# Altium PCB Ej4Electro3.PcbDoc
Units mm, origin at the board's own origin, x right, y up, seen from the top; angles counter-clockwise.
Board outline 100 x 50 mm, 2 copper layers (Top Layer, Bottom Layer); 23 components, 20 nets, 70 pads, 0 vias.
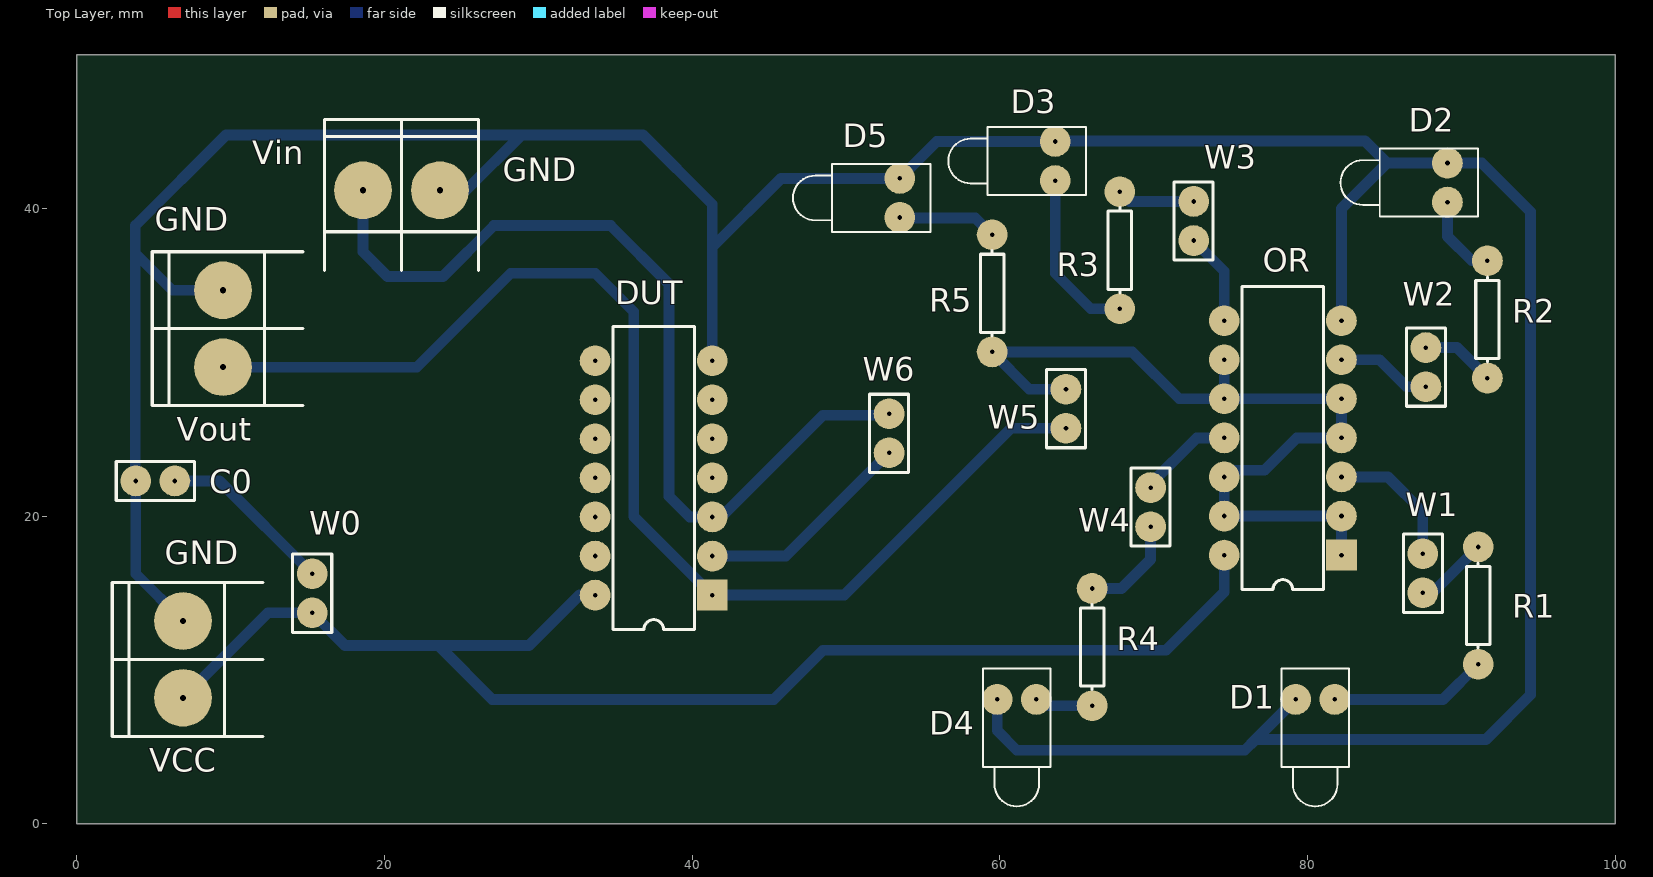
[diagram p0: Top Layer view]
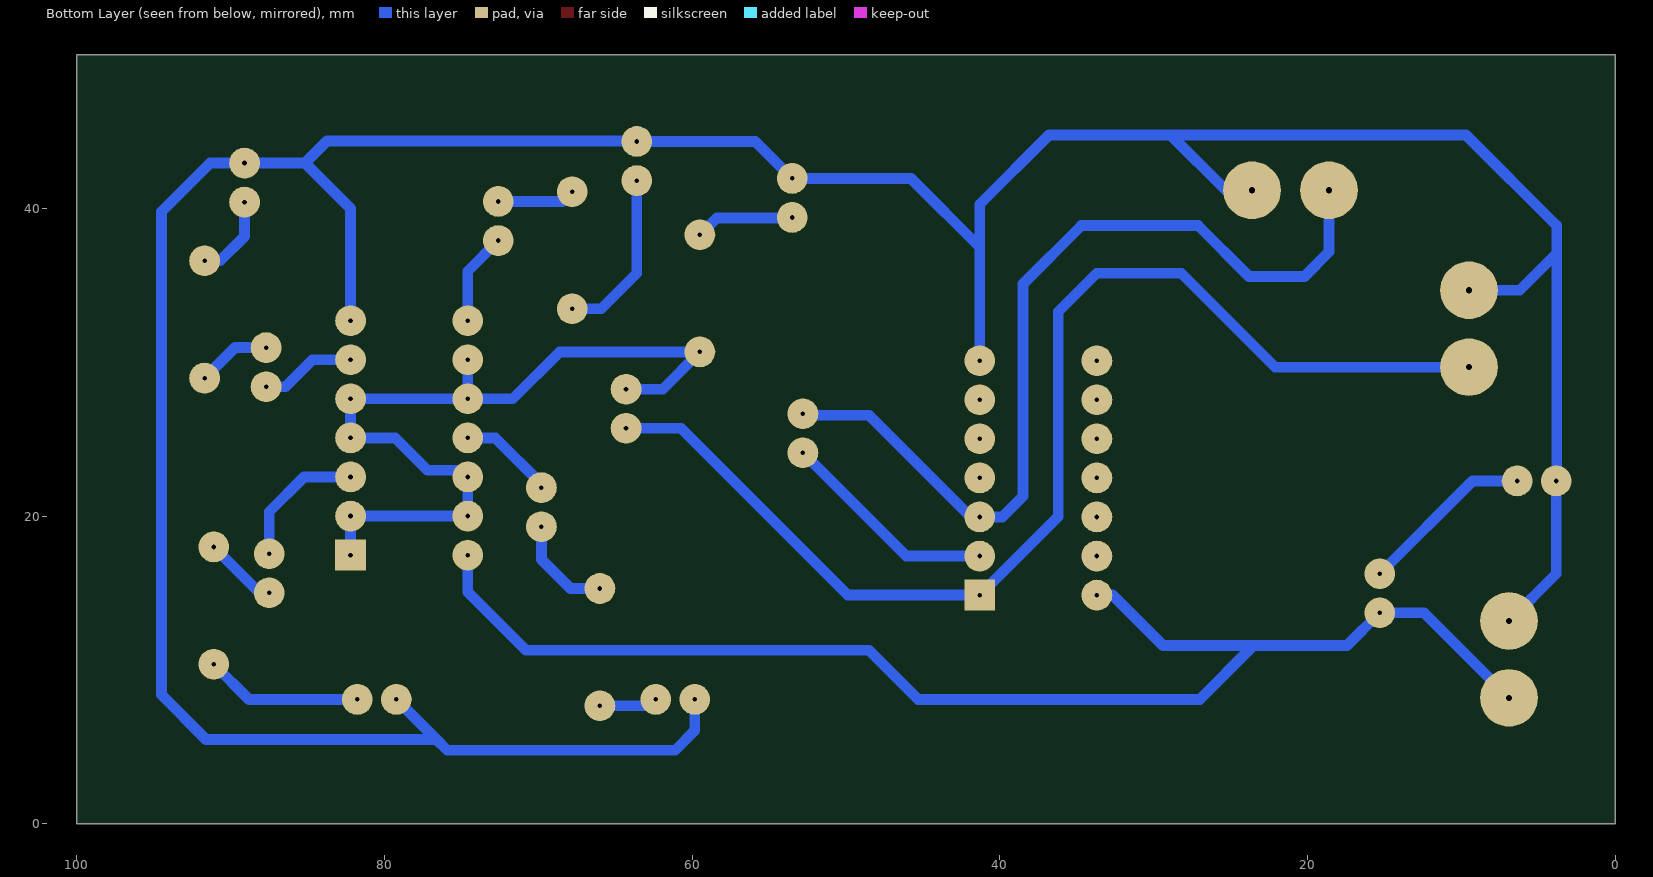
[diagram p1: Bottom Layer view, seen from below]

## Layer stack, top to bottom
Top Layer: signal copper 0.0356
Dielectric: dielectric 0.32, FR-4, Dk 4.8
Bottom Layer: signal copper 0.0356

## Board outline
0,0 100,0 100,50 0,50

## Design rules (kind name [scope] priority, off if disabled: settings)
Clearance [All] p1: gap=0.4
PolygonConnect [All] p1: connectstyle=Relief reliefconductorwidth=0.254 reliefentries=4 polygonreliefangle="90 Angle" airgapwidth=0.254
RoutingVias [All] p1: holewidth=0.4 width=2 viastyle="Through Hole" minholewidth=0.4 minwidth=2 maxholewidth=0.4 maxwidth=2
SolderMaskExpansion [All] p1: expansion=0.102
Width [All] p1: maxlimit=0.7 minlimit=0.7 preferedwidth=0.7
28 further rules are at their usual default settings.

## Classes and differential pairs
component class Ej4Electro3: C0 D1 D2 D3 D4 D5 DUT GND OR R1 R2 R3 R4 R5 W0 W1 W2 W3 W5 W6

## Components (designator, comment, footprint, x,y, rotation, side; value= is the part's Value field where it differs from the comment)
C0 "100pF" RAD-0.1 5.1,22.3 r0 top
D1 "LED1" LED-1 80.5,8.1 r270 top
D2 "LED1" LED-1 89.1,41.7 r180 top
D3 "LED1" LED-1 63.6,43.1 r180 top
D4 "LED1" LED-1 61.1,8.1 r270 top
D5 "LED1" LED-1 53.5,40.7 r180 top
DUT "SN74HC02N" N014 37.5,22.5 r90 top (schematic designator U2)
GND "BORNERA 2" BORNERA2 21.1,41.2 r270 top (schematic designator J2)
GND "BORNERA 2" BORNERA2 9.5,32.2 r0 top (schematic designator J3)
OR "SN74LS00N" N014 78.4,25.1 r90 top (schematic designator U1)
R1 "1K" AXIAL-0.3 91.1,14.2 r270 top
R2 "1K" AXIAL-0.3 91.7,32.8 r90 top
R3 "1K" AXIAL-0.3 67.8,37.3 r270 top
R4 "1K" AXIAL-0.3 66,11.5 r270 top
R5 "560" AXIAL-0.3 59.5,34.5 r90 top
VCC "BORNERA 2" BORNERA2 6.9,10.7 r0 top (schematic designator J1)
W0 "Jumper" RAD-0.1 15.3,15 r90 top
W1 "Jumper" RAD-0.1 87.5,16.3 r270 top
W2 "Jumper" RAD-0.1 87.7,29.7 r90 top
W3 "Jumper" RAD-0.1 72.6,39.2 r90 top
W4 "Jumper" RAD-0.1 69.8,20.6 r270 top
W5 "Jumper" RAD-0.1 64.3,27 r90 top
W6 "Jumper" RAD-0.1 52.8,25.4 r270 top (schematic designator W4)

## Footprints (in the part's own frame and the unit in brackets; to place one, negate y for a bottom-side part, rotate by r counter-clockwise, add the part's x,y. Pads: shape width x height; smd on the part's side, far side on the other; paste and mask are expansions set on the pad)
AXIAL-0.3 [mm] "Axial Device, Thru-Hole; 2 Leads; 0.3 in Pin Spacing"
  round 2 hole 0.3: 1(-3.81,0) 2(3.81,0)
  silkscreen extent -2.77,-0.76 2.77,0.76
BORNERA2 [mm] "Bornera con Tornillos 5mm separación"
  round 3.75 hole 0.4: 1(0,2.5) 2(0,-2.5)
  silkscreen extent -4.6,-5 5.2,5, body extent -3.76,-4.89 3.94,5.61, height 10
LED-1 [mm] "LED; 2 Leads"
  round 2 hole 0.3: 1(0,1.27) 2(0,-1.27)
  silkscreen extent -2,-2.2 6.95,2.2
N014 [mm] "DIP; 14 Leads; Row Spacing 7.62 mm; Pitch 2.54 mm"
  rect 2x2 hole 0.3: 1(-7.62,-3.81)
  round 2 hole 0.3: 2(-5.08,-3.81) 3(-2.54,-3.81) 4(0,-3.81) 5(2.54,-3.81) 6(5.08,-3.81) 7(7.62,-3.81) 8(7.62,3.81) 9(5.08,3.81) 10(2.54,3.81) 11(0,3.81) 12(-2.54,3.81) 13(-5.08,3.81) 14(-7.62,3.81)
  silkscreen extent -9.85,-2.65 9.85,2.65
RAD-0.1 [mm] "Radial Cap, Thru-Hole; 2 Leads; 0.1 in Pin Spacing"
  round 2 hole 0.3: 1(-1.27,0) 2(1.27,0)
  silkscreen extent -2.54,-1.27 2.54,1.27

## Part data
C0: library part Cap, "Capacitor"
D1 D2 D3 D4 D5: "Typical RED GaAs LED"
DUT: "Quadruple 2-Input Positive-NOR Gate"
OR: "Quadruple 2-Input Positive-NAND Gate"
R1 R2 R3 R4 R5: library part Res1, "Resistor"
W0 W1 W2 W3 W4 W5 W6: "Jumper Wire"

## Nets (pads, with @x,y where several pads share a name; then routed paths per layer and width w, separated by ;. In a path a pad name is that pad's centre, name@x,y a point inside that pad or via, vN(x,y) a via of type N, cw(c..) or ccw(c..) an arc to the next point about the centre after c; other vN are vias at no path point)
GND: C0.1 D1.2 D2.2 D3.2 D4.2 D5.2 DUT.7 GND.1 OR.7 VCC.1 | length 235.6
  Bottom Layer w0.7: C0.1@3.8,22.33 3.8,38.9 9.7,44.8 28.9,44.8 ; 3.8,37.1 6.2,34.7 GND.1@9.5,34.7 ; C0.1 3.83,16.27 VCC.1 ; GND.1@23.6,41.2 25.3,41.2 28.9,44.8 ; DUT.7 41.31,37.5 ; D4.2 59.83,6.07 61.1,4.8 75.93,4.8 76.63,5.5 ; D1.2 76.63,5.5 ; OR.7 82.21,40.01 85.17,42.97 ; 28.9,44.8 36.8,44.8 41.31,40.29 41.31,37.5 ; 41.31,37.5 45.78,41.97 D5.2 55.9,44.37 D3.2 63.63,44.4 83.74,44.4 85.17,42.97 ; 76.63,5.5 91.6,5.5 94.5,8.4 94.5,39.8 91.33,42.97 D2.2 85.17,42.97
NetC0_2: C0.2 W0.2 | length 11.4
  Bottom Layer w0.7: C0.2 9.27,22.3 W0.2
NetD1_1: D1.1 R1.2 | length 10.3
  Bottom Layer w0.7: D1.1 88.81,8.1 R1.2
NetD2_1: D2.1 R2.2 | length 5.5
  Bottom Layer w0.7: D2.1 89.1,38.2 90.69,36.61 R2.2
NetD3_1: D3.1 R3.2 | length 11.2
  Bottom Layer w0.7: D3.1 63.6,35.8 65.91,33.49 R3.2
NetD4_1: D4.1 R4.2 | length 4.4
  Bottom Layer w0.7: D4.1 62.78,7.69 R4.2 R4.2@65.59,8.1
NetD5_1: D5.1 R5.2 | length 5.9
  Bottom Layer w0.7: D5.1@54.1,39.4 58.41,39.4 R5.2
NetR1_1: R1.1 W1.2 | length 4.8
  Bottom Layer w0.7: W1.2 88.12,15.03 R1.1
NetR2_1: R2.1 W2.2 | length 4.8
  Bottom Layer w0.7: W2.2 89.72,30.97 R2.1
NetR3_1: R3.1 W3.2 | length 5.1
  Bottom Layer w0.7: R3.1 68.44,40.47 W3.2
NetR4_1: R4.1 W4.2 | length 6.7
  Bottom Layer w0.7: R4.1 67.91,15.31 69.8,17.2 W4.2
NetR5_1: OR.1 OR.2 OR.4 OR.5 OR.9 OR.10 OR.12 OR.13 R5.1 W5.2 | length 56.2
  Bottom Layer w0.7: W5.2 61.92,28.27 R5.1 68.61,30.69 71.66,27.64 OR.10 ; OR.9 OR.10 ; OR.1 OR.2 OR.13 OR.12 75.03,23 77.2,23 79.3,25.1 OR.4 OR.5 OR.10
NetU1_3: OR.3 W1.1 | length 9
  Bottom Layer w0.7: OR.3 85.24,22.56 87.5,20.3 W1.1
NetU1_6: OR.6 W2.1 | length 6.2
  Bottom Layer w0.7: OR.6 84.68,30.18 86.43,28.43 W2.1
NetU1_8: OR.8 W3.1 | length 6
  Bottom Layer w0.7: W3.1 74.59,35.94 OR.8
NetU1_11: OR.11 W4.1 | length 6.3
  Bottom Layer w0.7: W4.1 69.8,22.1 72.8,25.1 OR.11
NetU2_2: DUT.2 W6.2 | length 14.3
  Bottom Layer w0.7: DUT.2 46.09,17.42 W6.2
VCC: DUT.14 OR.14 VCC.2 W0.1 | length 89
  Bottom Layer w0.7: VCC.2 12.43,13.73 W0.1 17.43,11.6 29.4,11.6 32.68,14.88 DUT.14 ; 23.6,11.5 27,8.1 45.3,8.1 48.5,11.3 70.8,11.3 74.59,15.09 OR.14
VIN: DUT.3 GND.2@18.6,41.2 W6.1 | length 58.8
  Bottom Layer w0.7: GND.2@18.6,41.2 18.6,37.2 20.2,35.6 23.8,35.6 27.1,38.9 34.7,38.9 38.5,35.1 38.5,21.3 39.84,19.96 DUT.3 41.89,19.96 48.5,26.57 W6.1@52.7,26.57
VOUT: DUT.1 GND.2@9.5,29.7 W5.1 | length 78.3
  Bottom Layer w0.7: GND.2@9.5,29.7 22.1,29.7 28.2,35.8 33.7,35.8 36.2,33.3 36.2,19.99 DUT.1 49.88,14.88 60.73,25.73 W5.1
pads on no net: DUT.4 DUT.5 DUT.6 DUT.8 DUT.9 DUT.10 DUT.11 DUT.12 DUT.13

## Silkscreen, mask and mechanical layers (free items; w line width, h text height)
Top Overlay:
  text "Vin" at 11.4,42.9 h1.52
  text "Vout" at 6.5,24.9 h1.52
  text "GND" at 5.7,16.9 h1.52